# EAGLE board Control_Unit_Board (EAGLE 6.4)
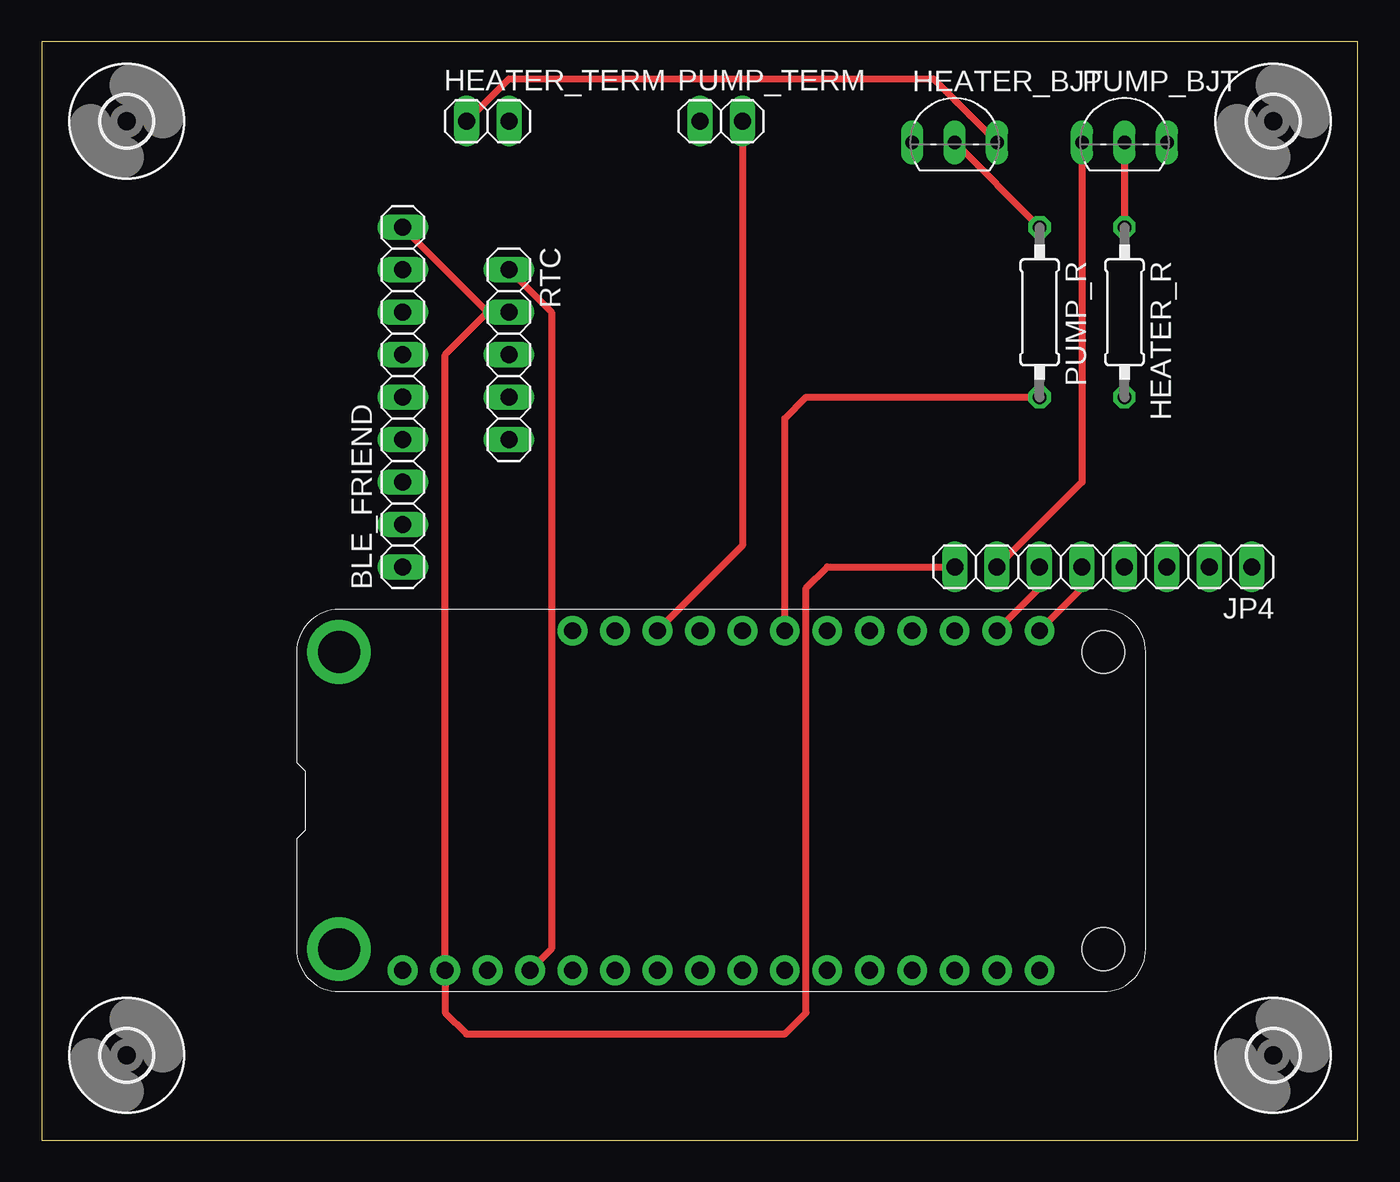
[diagram p0: board, top side]
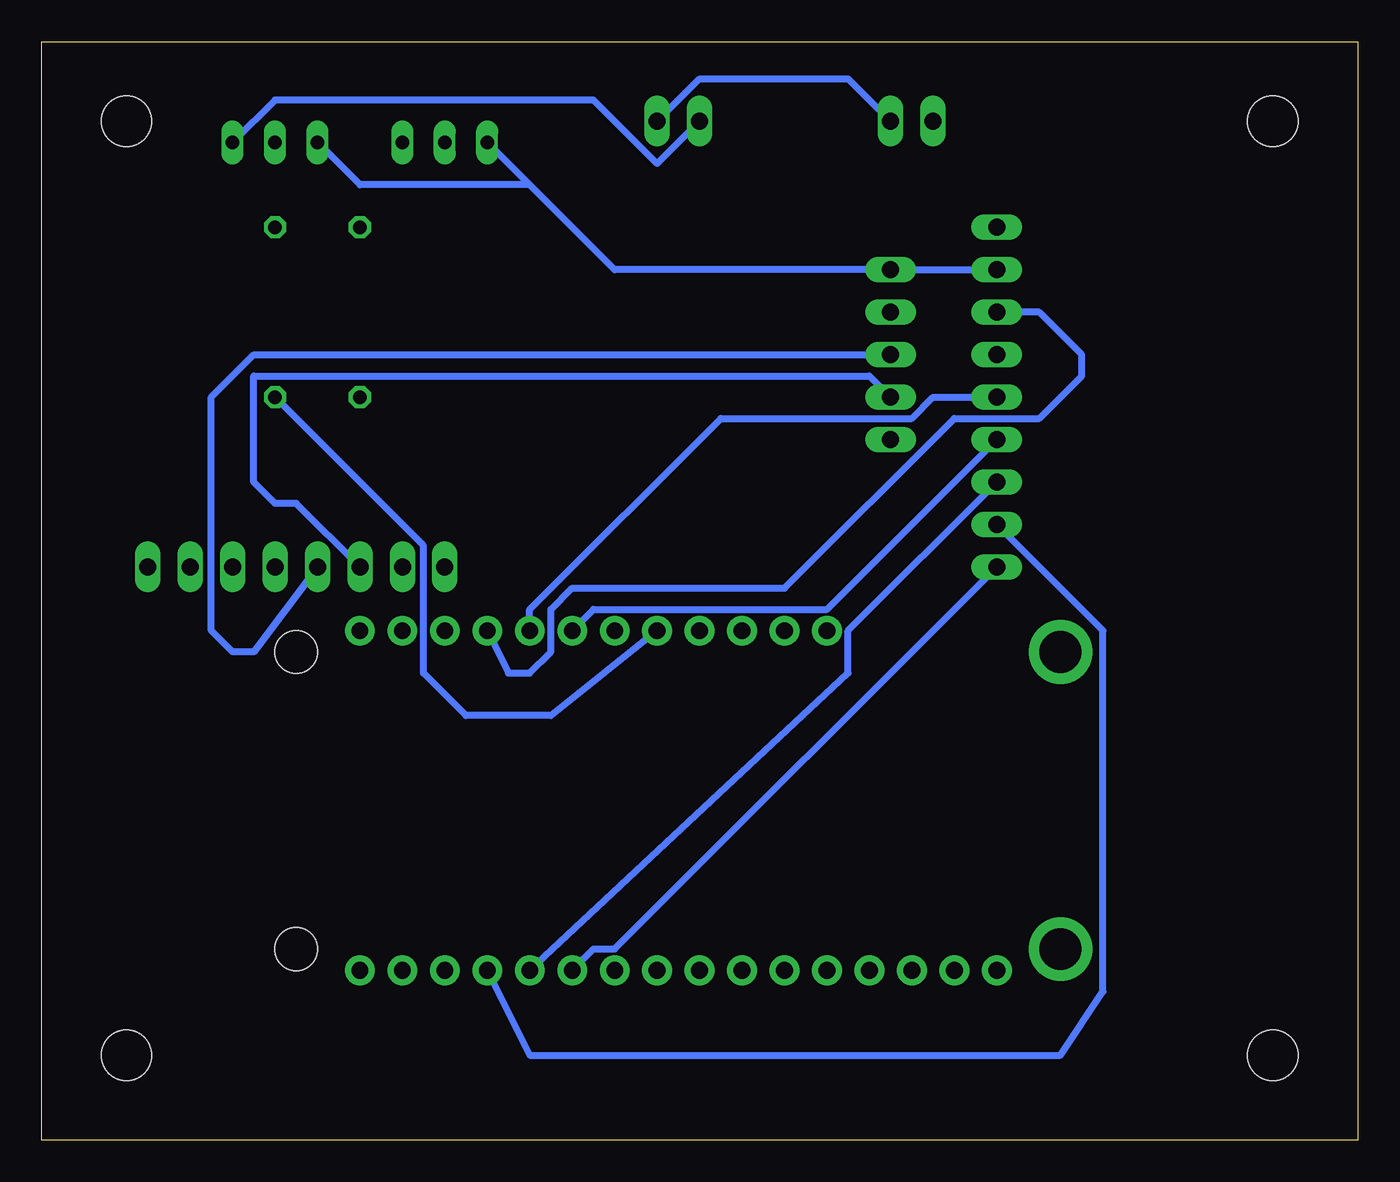
[diagram p1: board, bottom side, seen from below]

Size 78.72 x 65.71 mm. Coordinates in mm from the lower left corner, seen from the top.
Outline: 0,0 78.72,0 78.72,65.71 0,65.71 0,0
Copper layers (1*16): Top 0.035559375mm / dielectric 1.501140625mm / Bottom 0.035559375mm
Design rules "typical_4pcb": minimum track width 10mil, minimum drill 15mil, track to track 6mil, track to pad 6mil, pad to pad 6mil, via to via 6mil, smd to smd 6mil, copper to edge 15mil, drill to drill 8mil, minimum pad ring 10mil, minimum via ring 8mil, stop-mask expansion 4mil, vias tented up to drill 0mil, thermal gap 10mil
Net classes: 0 default: width 0.406 mm

## Footprints (pad centres in the part's own frame; a part is rotated, then mirrored left to right if it is on the bottom)
1X09 = drill 1.016 long: 1 -10.16,0; 2 -7.62,0; 3 -5.08,0; 4 -2.54,0; 5 0,0; 6 2.54,0; 7 5.08,0; 8 7.62,0; 9 10.16,0
TO92-EBC-OVAL = drill 0.813 long: B 0,-1.27; C 2.54,-1.27; E -2.54,-1.27
0207/10 = drill 0.813 octagon: 1 -5.08,0; 2 5.08,0
1X02 = drill 1.016 long: 1 -1.27,0; 2 1.27,0
1X08 = drill 1.016 long: 1 -8.89,0; 2 -6.35,0; 3 -3.81,0; 4 -1.27,0; 5 1.27,0; 6 3.81,0; 7 6.35,0; 8 8.89,0
FEATHERWING_DIM = drill 1 pad 1.778: 1 6.35,1.27; 2 8.89,1.27; 3 11.43,1.27; 4 13.97,1.27; 5 16.51,1.27; 6 19.05,1.27; 7 21.59,1.27; 8 24.13,1.27; 9 26.67,1.27; 10 29.21,1.27; 11 31.75,1.27; 12 34.29,1.27; 13 36.83,1.27; 14 39.37,1.27; 15 41.91,1.27; 16 44.45,1.27; 17 44.45,21.59; 18 41.91,21.59; 19 39.37,21.59; 20 36.83,21.59; 21 34.29,21.59; 22 31.75,21.59; 23 29.21,21.59; 24 26.67,21.59; 25 24.13,21.59; 26 21.59,21.59; 27 19.05,21.59; 28 16.51,21.59 | drill 2.5 pad 3.81: P$1 2.54,20.32; P$2 2.54,2.54 | hole 2.54: 48.26,20.32; 48.26,2.54
1X05 = drill 1.016 long: 1 -5.08,0; 2 -2.54,0; 3 0,0; 4 2.54,0; 5 5.08,0
3,0 = hole 3: 0,0

## Placement (x,y rotation side)
BLE_FRIEND  [1X09]  21.59,44.45 90 top
HEATER_BJT  2N2222  [TO92-EBC-OVAL]  54.61,60.96 0 top
HEATER_R  [0207/10]  64.77,49.53 270 top
HEATER_TERM  [1X02]  26.67,60.96 0 top
JP4  [1X08]  63.5,34.29 180 top
MS1  FEATHERWING_NODIM  [FEATHERWING_DIM]  15.24,8.89 0 top
PUMP_BJT  2N2222  [TO92-EBC-OVAL]  64.77,60.96 0 top
PUMP_R  [0207/10]  59.69,49.53 270 top
PUMP_TERM  [1X02]  40.64,60.96 0 top
RTC  [1X05]  27.94,46.99 270 top
U$1  [3,0]  73.66,60.96 0 top
U$2  [3,0]  5.08,60.96 0 top
U$3  [3,0]  5.08,5.08 0 top
U$4  [3,0]  73.66,5.08 0 top

## Library data of the parts
BLE_FRIEND HEATER_TERM JP4 PUMP_TERM RTC = pinhead
HEATER_BJT MS1 PUMP_BJT = adafruit
HEATER_R PUMP_R = eagle-ltspice; SPICEMODEL: NONE; SPICEPREFIX: R
U$1-U$4 = holes

## Nets
GND: BLE_FRIEND.8 HEATER_BJT.E JP4.7 MS1.4 PUMP_BJT.E RTC.1
N$1: BLE_FRIEND.2 MS1.13
N$2: BLE_FRIEND.3 MS1.12
N$3: BLE_FRIEND.1 MS1.11
N$5: BLE_FRIEND.5 MS1.21
N$6: MS1.23 PUMP_R.2
N$7: HEATER_R.2 MS1.24
N$8: HEATER_R.1 PUMP_BJT.B
N$9: HEATER_BJT.B PUMP_R.1
N$10: JP4.5 MS1.17 RTC.3
N$11: PUMP_BJT.C PUMP_TERM.1
N$12: HEATER_BJT.C HEATER_TERM.1
N$14: JP4.6 MS1.18 RTC.4
N$15: BLE_FRIEND.7 MS1.20
S$1: BLE_FRIEND.4 MS1.22
USB: HEATER_TERM.2 MS1.26 PUMP_TERM.2
VCC: BLE_FRIEND.9 JP4.8 MS1.2 RTC.2

## Tracks (layer width: path | path; a pad name or v marks a point on that pad's centre or on a via)
GND
  Top 0.406: JP4.7 62.23,39.37 PUMP_BJT.E | MS1.4 30.48,11.43 30.48,49.53 RTC.1
  Bottom 0.406: 49.53,57.15 44.45,52.07 RTC.1 BLE_FRIEND.8 | 49.53,57.15 HEATER_BJT.E | PUMP_BJT.E 59.69,57.15 49.53,57.15
N$1
  Bottom 0.406: BLE_FRIEND.2 15.24,30.48 15.24,8.89 17.78,5.08 49.53,5.08 MS1.13
N$2
  Bottom 0.406: BLE_FRIEND.3 30.48,30.48 30.48,27.94 MS1.12
N$3
  Bottom 0.406: BLE_FRIEND.1 44.45,11.43 45.72,11.43 MS1.11
N$5
  Bottom 0.406: BLE_FRIEND.5 25.4,44.45 26.67,43.18 38.1,43.18 49.53,31.75 MS1.21
N$6
  Top 0.406: PUMP_R.2 45.72,44.45 44.45,43.18 MS1.23
N$7
  Bottom 0.406: HEATER_R.2 55.88,35.56 55.88,27.94 53.34,25.4 48.26,25.4 MS1.24
N$8
  Top 0.406: PUMP_BJT.B HEATER_R.1
N$9
  Top 0.406: PUMP_R.1 HEATER_BJT.B
N$10
  Top 0.406: MS1.17 62.23,33.02 JP4.5
  Bottom 0.406: RTC.3 66.04,46.99 68.58,44.45 68.58,30.48 67.31,29.21 66.04,29.21 JP4.5
N$11
  Bottom 0.406: PUMP_BJT.C 64.77,62.23 45.72,62.23 41.91,58.42 PUMP_TERM.1
N$12
  Top 0.406: HEATER_BJT.C 53.34,63.5 27.94,63.5 HEATER_TERM.1
N$14
  Top 0.406: MS1.18 59.69,33.02 JP4.6
  Bottom 0.406: RTC.4 29.21,45.72 66.04,45.72 66.04,39.37 64.77,38.1 63.5,38.1 JP4.6
N$15
  Bottom 0.406: BLE_FRIEND.7 19.05,49.53 16.51,46.99 16.51,45.72 19.05,43.18 24.13,43.18 34.29,33.02 46.99,33.02 48.26,31.75 48.26,29.21 49.53,27.94 50.8,27.94 MS1.20
S$1
  Bottom 0.406: BLE_FRIEND.4 31.75,31.75 45.72,31.75 MS1.22
USB
  Top 0.406: MS1.26 41.91,35.56 PUMP_TERM.2
  Bottom 0.406: HEATER_TERM.2 30.48,63.5 39.37,63.5 PUMP_TERM.2
VCC
  Top 0.406: 26.67,49.53 BLE_FRIEND.9 | JP4.8 46.99,34.29 45.72,33.02 45.72,7.62 44.45,6.35 25.4,6.35 24.13,7.62 MS1.2 24.13,46.99 26.67,49.53 | 26.67,49.53 RTC.2